# Altium PCB 5mm-6DUT-ECAL.PcbDoc (part 2 of 2)
Units mm, origin at the board's own origin, x right, y up, seen from the top; angles counter-clockwise.
Board outline 62 x 119 mm, 4 copper layers (Top Layer, Mid-Layer 1, Mid-Layer 2, Bottom Layer), stack 1.105 mm thick; 68 components, 63 nets, 769 pads, 1024 vias.
Unrouted connection lines stored in the file: 1.
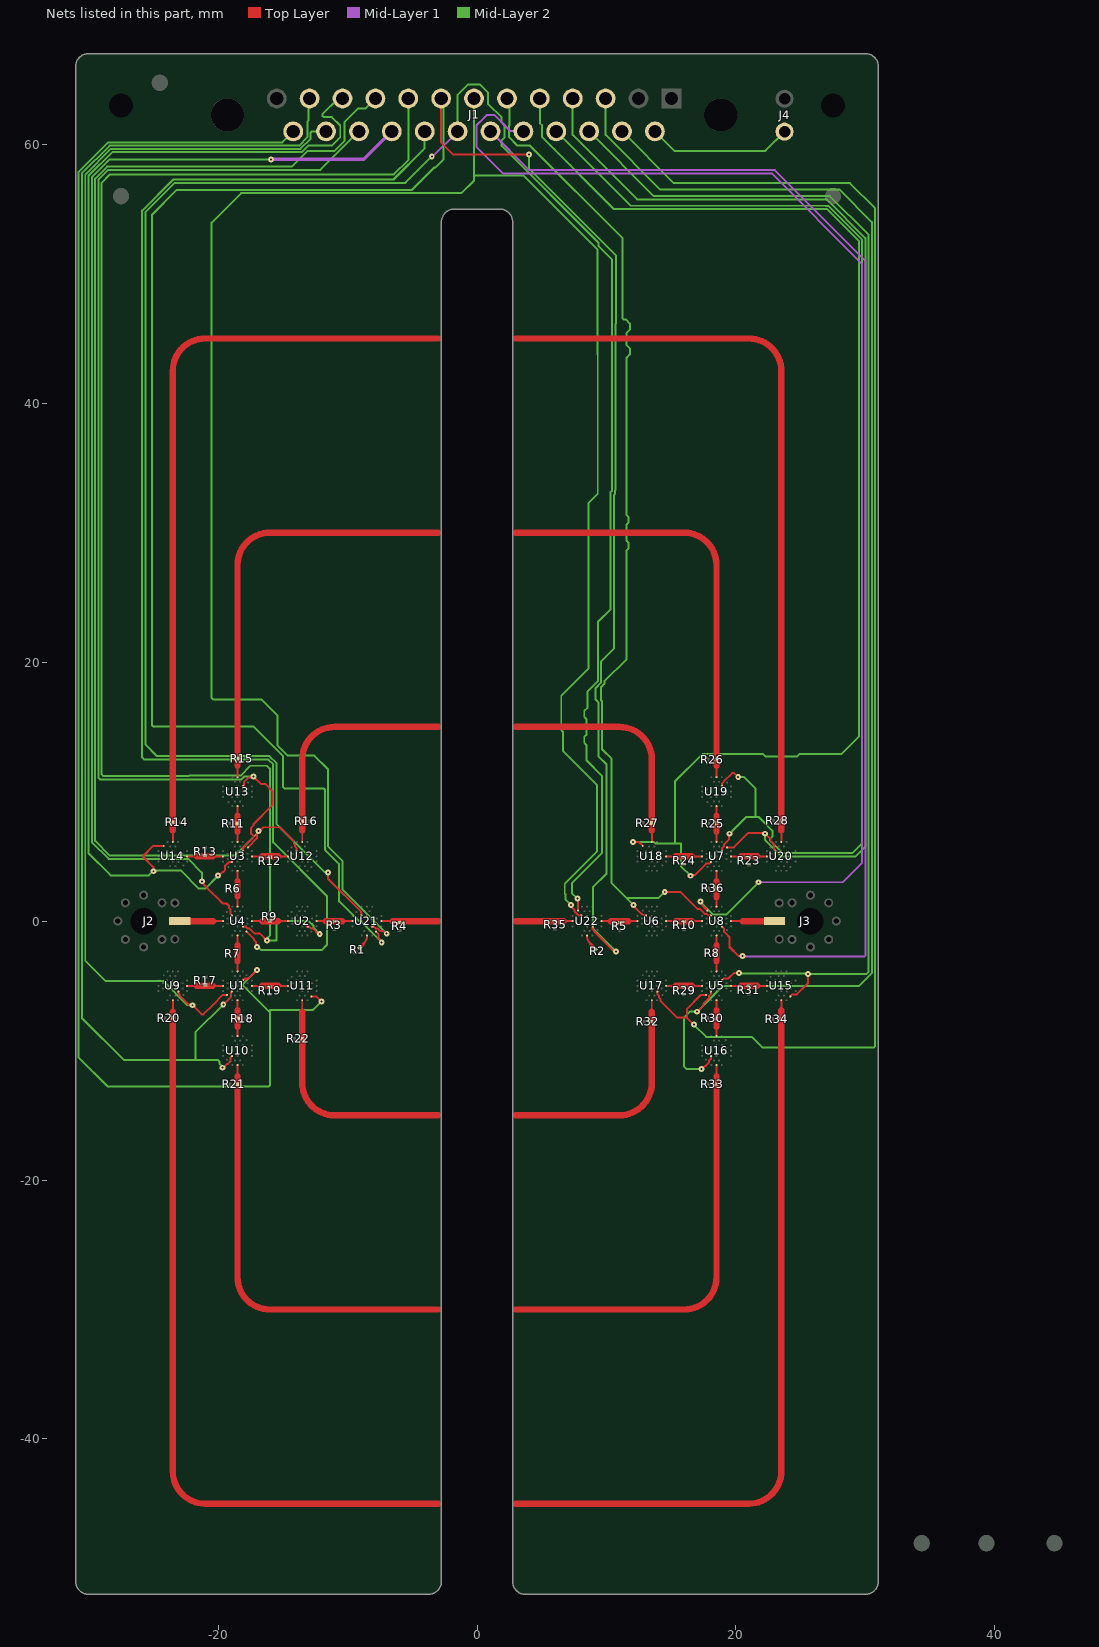
[diagram p4: the nets of this part, all layers, seen from the top]

## Via types
v1: diameter 0.457, hole 0.152, Top Layer to Bottom Layer, 964 vias
v2: diameter 2, hole 1.8, Top Layer to Bottom Layer, 60 vias

## Nets (pads, with @x,y where several pads share a name; then routed paths per layer and width w, separated by ;. In a path a pad name is that pad's centre, name@x,y a point inside that pad or via, vN(x,y) a via of type N, cw(c..) or ccw(c..) an arc to the next point about the centre after c; other vN are vias at no path point) (continued)
NetJ1_3: J1.3 U5.16 U16.16 | length 108.7
  Top Layer w0.152: v1(17,-7) 17.497,-6.503 17.497,-6.355 17.935,-5.917 17.935,-5.77 18.065,-5.64 U5.16@18.065,-5.435 ; v1(17.327,-11.416) 17.409,-11.416 17.687,-11.138 17.714,-11.138 17.934,-10.918 17.934,-10.771 18.065,-10.64 U16.16@18.065,-10.435
  Mid-Layer 2 w0.152: J1.3@9.93,63.54 9.93,60.721 14.151,56.5 28,56.5 30.502,53.998 30.502,-4.015 29.518,-5 19,-5 v1(17,-7) 16.439,-7 16,-7.439 16,-11.25 16.166,-11.416 v1(17.327,-11.416)
NetJ1_4: J1.4 U7.2 U20.21 | length 89.9
  Top Layer w0.152: U7.2@19.317,5.699 19.844,5.699 20.955,6.809 22.109,6.809 22.168,6.75 v1(22.25,6.75) 22.687,6.313 22.687,6.165 22.935,5.917 22.935,5.565 U20.21@23.065,5.435
  Mid-Layer 2 w0.152: J1.4@7.39,63.54 7.39,60.721 12.364,55.748 27,55.748 29.998,52.75 29.998,5.748 29.25,5 23.5,5 22.25,6.25 v1(22.25,6.75)
NetJ1_5: J1.5 U7.21 U18.2 | length 99.2
  Top Layer w0.152: v1(12.051,6.119) 12.06,6.11 12.509,6.11 U18.2@12.801,5.817 ; v1(16.5,3.5) 16.558,3.558 16.82,3.558 17.697,4.435 17.935,4.435 U7.21@18.065,4.565
  Mid-Layer 2 w0.152: J1.5@4.85,63.54 4.85,61.636 5.025,61.461 5.025,60.546 10.569,55.002 26.855,55.002 26.859,54.998 27.036,54.998 29.493,52.541 29.493,14.243 28.15,12.9 24.9,12.9 24.731,12.731 22.269,12.731 22.1,12.9 17.4,12.9 15.291,10.791 15.291,6 ; v1(12.051,6.119) 13.653,6.119 13.772,6 15.291,6 ; v1(16.5,3.5) 15.75,4.25 15.75,6 15.291,6
NetJ1_6: J1.6 U6.16 U8.16 | length 78.1
  Top Layer w0.152: v1(12.075,1.25) 12.075,1.189 12.697,0.566 12.729,0.566 12.86,0.435 U6.16@13.065,0.435 ; v1(14.5,2.25) 15.71,2.25 17.019,0.941 17.207,0.941 17.583,0.565 17.73,0.565 17.86,0.435 U8.16@18.065,0.435
  Mid-Layer 2 w0.152: J1.6@2.31,63.54 2.514,63.336 2.514,61.483 2.485,61.454 2.485,60.546 3.126,59.905 4.092,59.905 11.25,52.747 11.25,46.54 11.311,46.48 11.484,46.48 11.811,46.152 11.811,45.689 11.559,45.437 11.559,44.484 11.811,44.231 11.811,43.769 11.559,43.516 11.559,31.365 11.693,31.231 11.693,30.769 11.559,30.635 11.559,29.365 11.693,29.231 11.693,28.769 11.559,28.635 11.559,20.234 9.843,18.518 9.843,18.329 9.575,18.061 9.575,17.057 9.652,16.98 9.652,13.273 10.4,12.525 10.4,2.925 11.538,1.787 ; v1(12.075,1.25) 11.538,1.787 ; v1(14.5,2.25) 14.037,1.787 11.538,1.787
NetJ1_7: J1.7 U21.16 U22.16 | length 160.6
  Top Layer w0.152: -8.165,-0.435 U21.16@-8.065,-0.435 -7.96,-0.435 -7.83,-0.565 -7.683,-0.565 -7.501,-0.747 -7.286,-0.747 -7.057,-0.975 v1(-6.975,-0.975) ; v1(7.243,1.25) 7.243,1.168 7.516,0.894 7.516,0.745 7.697,0.565 7.73,0.565 7.86,0.435 U22.16@8.065,0.435
  Mid-Layer 2 w0.152: -20.5,53.958 -20.5,17.214 -20.411,17.125 -16.65,17.125 -15.425,15.9 -15.425,13.575 -14.627,12.777 -12.567,12.777 -11.5,11.711 -11.5,5.75 -10.375,4.625 -10.375,2.425 v1(-6.975,-0.975) ; -20.492,53.958 -18.225,56.225 -1.21,56.225 -0.23,57.205 -0.23,57.575 ; J1.7@-0.23,63.54 -0.23,57.575 ; v1(7.243,1.25) 7.243,1.257 6.848,1.652 6.848,2.057 6.775,2.13 6.775,2.894 9.25,5.369 9.25,10.525 6.624,13.151 6.624,14.633 6.506,14.75 6.506,17.406 8.625,19.525 8.625,32.3 9.325,33 9.325,43.767 9.324,43.769 9.324,51.851 3.6,57.575 -0.23,57.575
NetJ1_8: J1.8 U21.2 U22.21 | length 179.9
  Top Layer w0.152: U21.2@-7.801,-0.817 -7.788,-0.817 -7.605,-1 -7.605,-1.313 -7.362,-1.555 v1(-7.362,-1.638) ; J1.8@-2.77,63.54 -2.77,61.541 -2.787,61.524 -2.787,60.162 -1.825,59.2 v1(4,59.2) ; U22.21@8.935,-0.435 8.935,-0.64 9.065,-0.77 9.065,-0.803 10.612,-2.35 v1(10.75,-2.35)
  Mid-Layer 2 w0.152: v1(-7.362,-1.638) -8.973,-0.027 -9.098,-0.027 -10.65,1.525 -10.65,4.4 -11.752,5.502 -11.752,10.161 -11.842,10.25 -14.886,10.25 -14.975,10.339 -14.975,12.74 -17.269,15.034 -22.267,15.034 -22.269,15.032 -25.008,15.032 -25.097,15.121 -25.097,54.578 -23.198,56.477 -5.023,56.477 -3.286,58.214 -3.204,58.214 -2.598,58.82 -2.598,63.368 J1.8@-2.77,63.54 ; v1(4,59.2) 4,58.143 10.752,51.391 10.752,46.17 10.694,46.112 10.694,33.287 10.675,33.268 10.675,33 10.575,32.9 10.575,21.05 9.591,20.066 9.591,18.434 9.15,17.993 9.15,17.125 9.4,16.875 9.4,12.7 10,12.1 10,3.65 8.95,2.6 8.95,-0.55 v1(10.75,-2.35)
NetJ1_9: J1.9 U2.16 U4.16 | length 111.3
  Top Layer w0.152: U4.16@-18.065,-0.435 -17.86,-0.435 -17.729,-0.566 -17.582,-0.566 -17.185,-0.964 -16.761,-0.964 v1(-16.225,-1.5) ; -13.165,-0.435 U2.16@-13.065,-0.435 -12.96,-0.435 -12.829,-0.566 -12.682,-0.566 -12.248,-1 v1(-12.148,-1)
  Mid-Layer 2 w0.152: v1(-16.225,-1.5) v1@-16.167,-1.5 ; v1(-12.148,-1) -12.62,-0.528 -12.62,-0.38 -13,0 -15.5,0 -15.5,-1.5 -16.091,-1.5 -16.167,-1.425 -16.167,-1.286 -16,-1.12 -16,11.772 -16.228,12 -17.5,12 -18.263,11.237 -22.223,11.237 -22.269,11.191 -28.865,11.191 -29,11.326 -29,57.025 -28.35,57.675 -6.415,57.675 -5.31,58.78 J1.9@-5.31,63.54
NetJ1_10: J1.10 U3.2 U12.21 | length 95.9
  Top Layer w0.152: U3.2@-17.683,5.699 -16.998,6.384 -16.998,6.752 v1@-16.829,6.921 ; v1(-16.884,6.975) v1@-16.829,6.921 ; U12.21@-13.935,5.435 -13.935,5.64 -14.066,5.771 -14.066,5.918 -14.156,6.008 -14.156,6.156 -15.25,7.25 -16.5,7.25 -16.587,7.163 v1@-16.829,6.921
  Mid-Layer 2 w0.152: v1(-16.884,6.975) -16.964,6.895 -16.964,6.786 -18.698,5.052 -28.352,5.052 -29.505,6.205 -29.505,57.195 -29.505,57.352 -28.575,58.282 -14.298,58.282 -13.112,59.469 -11.031,59.469 -10.25,60.25 -10.25,61.7 -9.2,62.75 -8.64,62.75 J1.10@-7.85,63.54
NetJ1_11: J1.11 U3.21 U14.2 | length 94.8
  Top Layer w0.152: v1(-24.975,3.85) -24.996,3.871 -24.996,4.171 -25.763,4.938 -25.763,5.065 -25.011,5.817 U14.2@-24.199,5.817 ; v1(-20.008,3.534) -19.925,3.534 -19.676,3.783 -19.617,3.783 -19.451,3.949 -19.451,4.287 -19.303,4.435 -19.27,4.435 -19.14,4.565 U3.21@-18.935,4.565
  Mid-Layer 2 w0.152: v1(-20.008,3.534) -20.008,3.5 -20.992,2.516 -21.481,2.516 -22.859,3.894 -24.931,3.894 v1(-24.975,3.85) -25.024,3.85 -25.344,3.531 -28.303,3.531 -30.01,5.237 -30.01,57.561 -28.171,59.4 -13.537,59.4 -13.032,59.905 -11.206,59.905 -10.565,60.546 -10.565,61.454 -11.206,62.095 -11.85,62.095 -11.939,62.184 -11.939,62.311 -10.71,63.54 J1.11@-10.39,63.54
NetJ1_12: J1.12 U1.16 U10.16 | length 107.2
  Top Layer w0.152: v1(-19.675,-11.325) -19.593,-11.325 -19.319,-11.051 -19.257,-11.051 -19.046,-10.84 -19.046,-10.546 U10.16@-18.935,-10.435 ; v1(-19.6,-6.45) -19.015,-5.865 -19.015,-5.515 U1.16@-18.935,-5.435
  Mid-Layer 2 w0.152: v1(-19.675,-11.325) -19.675,-11.243 -19.892,-11.025 -19.892,-10.852 -20,-10.744 -21.75,-10.744 ; v1(-19.6,-6.45) -21.75,-8.6 -21.75,-10.744 ; J1.12@-12.93,63.54 -13,63.47 -13,61.843 -13.105,61.738 -13.105,60.546 -13.746,59.905 -28.38,59.905 -30.514,57.77 -30.514,-7.486 -27.256,-10.744 -21.75,-10.744
NetJ1_14: J1.14 J4.2 | length 11.2
  Mid-Layer 2 w0.152: J1.14@13.74,61 15.24,59.5 22.27,59.5 J4.2@23.75,60.98
NetJ1_15: J1.15 U5.2 U17.21 | length 108.3
  Top Layer w0.152: U17.21@13.935,-5.435 13.935,-5.64 14.066,-5.771 14.066,-5.918 14.156,-6.008 14.156,-6.156 15.454,-7.454 16.204,-7.454 ; v1(16.75,-8) 16.204,-7.454 ; U5.2@17.683,-5.699 17.301,-5.699 16.204,-6.796 16.204,-7.454
  Mid-Layer 2 w0.152: J1.15@11.2,61 15.2,57 28.8,57 30.755,55.045 30.755,-9.656 30.661,-9.75 22.037,-9.75 21.229,-8.941 17.691,-8.941 v1(16.75,-8)
NetJ1_16: J1.16 U5.21 U15.2 | length 96
  Top Layer w0.152: U5.21@18.935,-4.565 19.065,-4.435 19.417,-4.435 19.852,-4 v1(20.25,-4) ; U15.2@24.199,-5.817 24.353,-5.663 24.708,-5.663 25.55,-4.821 v1(25.55,-4.075)
  Mid-Layer 2 w0.152: J1.16@8.66,61 13.66,56 27.25,56 30.25,53 30.25,-3.911 30.086,-4.075 v1(25.55,-4.075) 25.512,-4.038 20.288,-4.038 v1(20.25,-4)
NetJ1_17: J1.17 U7.16 U19.16 | length 94
  Top Layer w0.152: U7.16@18.935,5.435 18.935,5.64 19.065,5.77 19.065,5.899 19.459,6.293 19.459,6.709 v1(19.5,6.75) ; U19.16@18.935,10.435 18.935,10.64 19.066,10.771 19.066,10.803 19.7,11.437 19.856,11.437 v1(20.174,11.119)
  Mid-Layer 2 w0.152: J1.17@6.12,61 11.865,55.255 26.959,55.255 26.964,55.25 27.141,55.25 29.745,52.645 29.745,5.998 29,5.252 23.605,5.252 22.637,6.22 22.637,6.346 22.809,6.519 22.809,6.981 21.75,8.04 21.5,8.04 ; v1(19.5,6.75) 20.79,8.04 21.5,8.04 ; v1@20.175,11.119 20.631,11.119 21.5,10.25 21.5,8.04
NetJ1_18: J1.18 U8.2 | length 101.4
  Top Layer w0.152: v1(17.25,1.5) 17.25,1.369 U8.2@17.801,0.817
  Mid-Layer 1 w0.152: J1.18@3.58,61 3.563,61.017 2.586,61.017 1.354,62.25 0.75,62.25 0.595,62.095 0.586,62.095 -0.055,61.454 -0.055,59.805 2,57.75 20.25,57.75 20.252,57.748 22.75,57.748 29.748,50.75 29.748,4.498 28.25,3 v1(21.75,3)
  Mid-Layer 2 w0.152: v1(17.25,1.5) 18.25,0.5 19.25,0.5 v1(21.75,3)
NetJ1_19: J1.19 U8.21 | length 99.4
  Top Layer w0.152: U8.21@18.935,-0.435 19.065,-0.565 19.065,-0.803 19.213,-0.951 19.215,-0.951 19.5,-1.236 19.5,-2 20.204,-2.704 20.487,-2.704 v1(20.5,-2.691)
  Mid-Layer 1 w0.152: J1.19@1.04,61 4.038,58.002 20.355,58.002 20.357,58 23,58 30,51 30,-2.661 29.911,-2.75 20.742,-2.75 ; v1(20.5,-2.691) 20.558,-2.75 20.741,-2.75
NetJ1_20: J1.20 U21.21 U22.2 | length 169.1
  Top Layer w0.152: v1(-11.5,3.75) -11.5,3.252 -8.953,0.705 -8.953,0.658 -8.935,0.64 U21.21@-8.935,0.435 ; v1(7.753,1.753) 7.801,1.704 U22.2@7.801,0.817
  Mid-Layer 1 w0.152: v1(-3.495,59.07) -3.417,59.07 -1.5,60.987 J1.20@-1.5,61
  Mid-Layer 2 w0.152: v1(-11.5,3.75) -11.546,3.796 -11.796,3.796 -15.48,7.48 -15.48,12.191 -16.039,12.75 -24.72,12.75 -25.602,13.632 -25.602,54.787 -23.359,57.03 -5.535,57.03 v1(-3.495,59.07) ; J1.20@-1.5,61 -1.5,63.823 -0.687,64.635 0.224,64.635 0.865,63.994 0.865,63.11 1.9,62.075 1.9,61.689 2.135,61.454 2.135,60.546 1.9,60.311 1.9,59.886 9.369,52.417 9.369,52.163 10.441,51.091 10.441,33.391 10.413,33.363 10.413,33.237 10.323,33.146 10.323,24.086 9.339,23.102 9.339,18.539 8.538,17.738 8.538,16.487 8.282,16.231 8.282,15.769 8.457,15.594 8.457,14.406 8.282,14.231 8.282,13.769 8.457,13.594 8.457,12.418 9.65,11.225 9.65,5.256 7.334,2.94 7.334,2.166 7.747,1.753 v1(7.753,1.753)
NetJ1_21: J1.21 U4.2 | length 100.6
  Top Layer w0.152: U4.2@-17.801,-0.817 -17.22,-1.399 -17.22,-1.467 -17.058,-1.628 -17.058,-1.942 v1(-17,-2)
  Mid-Layer 2 w0.152: v1(-17,-2) -16.918,-2 -16.668,-2.25 -12,-2.25 -11.589,-1.839 -11.589,1.921 -15.748,6.08 -15.748,12.102 -16.121,12.475 -25.7,12.475 -25.875,12.65 -25.875,54.871 -23.464,57.282 -6.451,57.282 -4.04,59.694 J1.21@-4.04,61
NetJ1_22: J1.22 U4.21 | length 89.9
  Top Layer w0.152: v1(-21.25,3.075) -21.25,2.993 -21.127,2.869 -21.127,2.856 -20.438,2.168 -20.438,2.16 -20.111,1.833 -20.103,1.833 -19.631,1.361 -19.35,1.361 -19.156,1.166 -19.156,1.008 -19.033,0.884 -19.033,0.533 U4.21@-18.935,0.435
  Mid-Layer 1 w0.254: v1(-15.925,58.841) -8.739,58.841 J1.22@-6.58,61
  Mid-Layer 2 w0.152: v1(-21.25,3.075) -21.25,3.75 -22.3,4.8 -28.458,4.8 -29.757,6.099 -29.757,57.457 -28.373,58.841 v1(-15.925,58.841)
NetJ1_23: J1.23 U3.16 U13.16 | length 88.9
  Top Layer w0.152: U3.16@-18.065,5.435 -18.065,5.64 -17.935,5.77 -17.935,5.803 -17.25,6.488 -17.25,6.551 -17.443,6.743 -17.443,7.206 -17.25,7.399 -17.25,7.5 -15.8,8.95 -15.8,10.05 -16.323,10.573 -16.684,10.573 v1(-17.265,11.155) -17.324,11.097 -17.64,11.097 -18.013,10.723 -18.013,10.487 U13.16@-18.065,10.435
  Mid-Layer 2 w0.152: v1(-17.265,11.155) -17.988,11.155 -18.204,10.939 -29.117,10.939 -29.252,11.074 -29.252,57.248 -28.475,58.025 -12.095,58.025 J1.23@-9.12,61
NetJ1_24: J1.24 U1.2 U9.21 | length 95.9
  Top Layer w0.152: U9.21@-23.065,-5.435 -23.065,-5.568 -22.985,-5.648 -22.985,-5.752 -22.935,-5.801 -22.935,-5.803 -22.787,-5.951 -22.785,-5.951 -22.277,-6.46 -22.015,-6.46 v1(-21.975,-6.5) -21.275,-7.2 -21.135,-7.2 -20.387,-6.452 -20.387,-6.447 -19.639,-5.699 U1.2@-19.317,-5.699
  Mid-Layer 2 w0.152: v1(-21.975,-6.5) -22.375,-6.5 -24.252,-4.623 -28.706,-4.623 -30.262,-3.067 -30.262,57.666 -28.275,59.652 -13.642,59.652 -12.852,60.442 -12.852,60.911 -12.763,61 J1.24@-11.66,61
NetJ1_25: J1.25 U1.21 U11.2 | length 119
  Top Layer w0.152: U1.21@-18.065,-4.565 -17.95,-4.45 -17.675,-4.45 -16.995,-3.77 v1(-16.98,-3.77) ; U11.2@-12.801,-5.817 -12.432,-5.818 v1(-12.025,-6.225)
  Mid-Layer 2 w0.152: v1(-16.98,-3.77) -18.063,-4.853 -18.063,-4.979 -16,-7.042 ; J1.25@-14.2,61 -15.043,60.157 -28.484,60.157 -30.767,57.875 -30.767,-10.546 -28.538,-12.775 -16.089,-12.775 -15.998,-12.683 -15.998,-7.095 -16,-7.093 -16,-6.85 -12.65,-6.85 v1(-12.025,-6.225)
NetJ2_1: J2.1 U4.11 | length 3.4
  Top Layer w0.152: -20.375,0 U4.11@-19.612,0
  Top Layer w0.495: J2.1@-22.975,0 -20.375,0
NetJ3_1: J3.1 U8.11 | length 3.4
  Top Layer w0.152: U8.11@19.615,-0.003 20.524,-0.003
  Top Layer w0.495: 20.524,-0.003 J3.1@22.972,-0.003
NetR1_1: R1.1 U21.14 | length 1.1
  Top Layer w0.152: -8.775,-1.775 ccw(c-9.438,-1.112) U21.14@-8.5,-1.112
  Top Layer w0.254: R1.1@-9.045,-2.045 -8.775,-1.775
NetR2_1: R2.1 U22.7 | length 1.1
  Top Layer w0.152: U22.7@8.5,-1.112 ccw(c9.438,-1.112) 8.775,-1.775
  Top Layer w0.254: 8.775,-1.775 R2.1@9.045,-2.045
NetR3_2: R3.2 U2.4 U21.11 | length 2.8
  Top Layer w0.152: U2.4@-12.388,0 -11.7,0 ; -10.4,0 U21.11@-9.612,0
  Top Layer w0.495: -11.7,0 -10.4,0
NetR4_2: R4.2 U21.4 | length 4.4
  Top Layer w0.152: U21.4@-7.388,0 -6.5,0
  Top Layer w0.495: -6.5,0 -3,0
NetR5_2: R5.2 U6.4 U22.11 | length 2.9
  Top Layer w0.152: U22.11@9.612,0 10.338,0 ; 11.696,0 U6.4@12.388,0
  Top Layer w0.495: 10.338,0 10.925,0 R5.2@11.025,-0.1 11.125,0 11.696,0
NetR6_2: R6.2 U3.11 U4.7 | length 2.8
  Top Layer w0.152: U4.7@-18.504,1.112 -18.504,1.9 ; -18.5,3.075 U3.11@-18.5,3.888
  Top Layer w0.495: -18.504,1.9 R6.2@-18.504,2.5 ; R6.2@-18.5,2.525 -18.5,3.075
NetR7_2: R7.2 U1.11 U4.14 | length 2.8
  Top Layer w0.152: U1.11@-18.5,-3.888 -18.5,-3.1 ; -18.5,-1.875 U4.14@-18.5,-1.112
  Top Layer w0.495: -18.5,-3.1 -18.5,-2.5 -18.5,-1.85
NetR8_2: R8.2 U5.11 U8.7 | length 2.8
  Top Layer w0.152: U5.11@18.496,-3.888 18.496,-3.1 ; 18.496,-1.875 U8.7@18.496,-1.112
  Top Layer w0.495: 18.496,-3.1 18.496,-1.85
NetR9_2: R9.2 U2.11 U4.4 | length 2.8
  Top Layer w0.152: U4.4@-17.392,0 -16.604,0 ; -15.379,0 -14.712,0 U2.11@-14.615,0
  Top Layer w0.495: -16.604,0 -16.087,0 -16.05,0 -16,0 -15.354,0
NetR10_2: R10.2 U6.11 U8.4 | length 2.8
  Top Layer w0.152: U6.11@14.612,0 15.375,0 ; 16.6,0 U8.4@17.388,0
  Top Layer w0.495: 15.35,0 16.6,0
NetR11_2: R11.2 U3.4 U13.11 | length 2.8
  Top Layer w0.152: U3.4@-18.5,6.112 -18.5,6.9 ; -18.5,8.125 U13.11@-18.5,8.888
  Top Layer w0.495: -18.5,6.9 -18.5,8.15
NetR12_2: R12.2 U3.14 U12.11 | length 2.8
  Top Layer w0.152: U3.14@-17.388,5 -16.6,5 ; -15.375,5 U12.11@-14.612,5
  Top Layer w0.495: -16.6,5 -16,5 -15.35,5
NetR13_2: R13.2 U3.7 U14.11 | length 2.8
  Top Layer w0.152: U14.11@-22.388,5 -21.625,5 ; -20.4,5 U3.7@-19.612,5
  Top Layer w0.495: -21.65,5 -20.4,5
NetR14_2: R14.2 U14.14 | length 58.3
  Top Layer w0.152: U14.14@-23.5,6.112 -23.5,7
  Top Layer w0.495: -23.5,7 -23.5,7.5 -23.5,42.5 cw(c-21,42.5) -21,45 ; -21.001,44.999 -3,44.999
NetR15_2: R15.2 U13.4 | length 33.3
  Top Layer w0.152: U13.4@-18.5,11.112 -18.5,12
  Top Layer w0.495: -18.5,12 -18.5,12.6 -18.5,27.5 cw(c-16,27.5) -16,30 -3,29.999
NetR16_2: R16.2 U12.7 | length 18.3
  Top Layer w0.152: U12.7@-13.5,6.112 -13.5,7
  Top Layer w0.495: -13.5,7 -13.5,9.1 -13.5,12.5 cw(c-11,12.5) -11,15 -3,15
NetR17_2: R17.2 U1.14 U9.11 | length 2.8
  Top Layer w0.152: U9.11@-22.388,-5 -21.625,-5 ; -20.4,-5 U1.14@-19.612,-5
  Top Layer w0.495: -21.65,-5 -20.4,-5
NetR18_2: R18.2 U1.4 U10.11 | length 2.8
  Top Layer w0.152: U10.11@-18.5,-8.888 -18.5,-8.125 ; -18.5,-6.9 U1.4@-18.5,-6.112
  Top Layer w0.495: -18.5,-8.15 -18.5,-6.9
NetR19_2: R19.2 U1.7 U11.11 | length 2.8
  Top Layer w0.152: U1.7@-17.388,-5 -16.6,-5 ; -15.375,-5 U11.11@-14.612,-5
  Top Layer w0.495: -16.6,-5 -15.35,-5
NetR20_2: R20.2 U9.7 | length 58.3
  Top Layer w0.152: -23.5,-7 U9.7@-23.5,-6.112
  Top Layer w0.495: -23.5,-7 R20.2@-23.5,-7.5 -23.5,-42.5 ccw(c-21.001,-42.5) -21.001,-44.999 -3,-44.999
NetR21_2: R21.2 U10.4 | length 33.3
  Top Layer w0.152: -18.5,-12 U10.4@-18.5,-11.112
  Top Layer w0.495: -18.5,-12 R21.2@-18.5,-12.6 -18.5,-27.5 ccw(c-16,-27.5) -16,-30 ; -16,-29.999 -3,-29.999
NetR22_2: R22.2 U11.14 | length 18.3
  Top Layer w0.152: -13.5,-7 U11.14@-13.5,-6.112
  Top Layer w0.495: -13.5,-7 R22.2@-13.5,-9.1 -13.5,-12.5 ccw(c-11,-12.5) -11,-15 -3,-15
NetR23_2: R23.2 U7.14 U20.11 | length 2.8
  Top Layer w0.152: U7.14@19.612,5 20.396,5 ; 21.646,5 U20.11@22.388,5
  Top Layer w0.495: 20.396,5 21.646,5
NetR24_2: R24.2 U7.7 U18.11 | length 2.8
  Top Layer w0.152: U18.11@14.612,5 15.346,5 ; 16.596,5 U7.7@17.385,5
  Top Layer w0.495: 15.346,5 16.596,5
NetR25_2: R25.2 U7.4 U19.11 | length 2.8
  Top Layer w0.152: U7.4@18.5,6.112 18.5,6.9 ; 18.5,8.125 U19.11@18.5,8.888
  Top Layer w0.495: 18.5,6.9 18.5,8.15
NetR26_2: R26.2 U19.4 | length 33.3
  Top Layer w0.152: U19.4@18.5,11.112 18.5,12
  Top Layer w0.495: 3,29.999 16,29.999 cw(c16,27.5) 18.5,27.5 18.5,12.6 18.5,12
NetR27_2: R27.2 U18.14 | length 18.3
  Top Layer w0.152: U18.14@13.5,6.112 13.5,7
  Top Layer w0.495: 3,15 11,15 cw(c11,12.5) 13.5,12.5 13.5,7
NetR28_2: R28.2 U20.7 | length 73.9
  Top Layer w0.152: U20.7@23.5,6.112 23.5,7
  Top Layer w0.495: 3,44.999 21.001,44.999 ; 5.476,44.999 21.011,44.999 ; 21,45 cw(c21,42.5) 23.5,42.5 23.5,7.5 23.5,7
NetR29_2: R29.2 U5.14 U17.11 | length 2.8
  Top Layer w0.152: U17.11@14.608,-5 15.371,-5 ; 16.596,-5 U5.14@17.385,-5
  Top Layer w0.495: 15.346,-5 16.596,-5
NetR30_2: R30.2 U5.4 U16.11 | length 2.8
  Top Layer w0.152: U16.11@18.496,-8.888 18.496,-8.125 ; 18.496,-6.9 U5.4@18.496,-6.112
  Top Layer w0.495: 18.496,-8.15 18.496,-6.9
NetR31_2: R31.2 U5.7 U15.11 | length 2.8
  Top Layer w0.152: U5.7@19.608,-5 20.396,-5 ; 21.621,-5 U15.11@22.385,-5
  Top Layer w0.495: 20.396,-5 21.646,-5
NetR32_2: R32.2 U17.7 | length 19.1
  Top Layer w0.152: 13.496,-7 U17.7@13.496,-6.112
  Top Layer w0.495: 3,-15 11,-15 ; 11.001,-14.999 ccw(c11.001,-12.5) 13.5,-12.5 13.5,-7.775 13.5,-7 ; R32.2@13.496,-7.775 13.496,-7
NetR33_2: R33.2 U16.4 | length 33.3
  Top Layer w0.152: 18.5,-11.996 U16.4@18.5,-11.112
  Top Layer w0.495: 3,-29.999 16,-29.999 ; 16,-30 ccw(c16,-27.5) 18.5,-27.5 18.5,-11.996
NetR34_2: R34.2 U15.14 | length 58.2
  Top Layer w0.152: 23.5,-6.9 U15.14@23.5,-6.112
  Top Layer w0.495: 3,-44.999 21.001,-44.999 ; 21,-45 ccw(c21,-42.5) 23.5,-42.5 R34.2@23.5,-7.575 ; R34.2@23.5,-7.427 23.5,-6.9
NetR35_2: R35.2 U22.4 | length 4.9
  Top Layer w0.152: 6.696,0 U22.4@7.388,0
  Top Layer w0.495: 3,0 6.5,0 ; R35.2@6,0 6.696,0
NetR36_2: R36.2 U7.11 U8.14 | length 2.8
  Top Layer w0.152: U8.14@18.496,1.112 18.496,1.875 ; 18.496,3.1 U7.11@18.496,3.888
  Top Layer w0.495: 18.496,1.85 18.496,2.525 18.496,3.1
pads on no net: f1.1 f2.1 f3.1 J1. J1.13 J2.gnd@-23.34,1.4 J2.gnd@-23.34,-1.4 J2.gnd@-24.336,1.414 J2.gnd@-24.336,-1.414 J2.gnd@-25.75,2 J2.gnd@-25.75,-2 J2.gnd@-27.164,1.414 J2.gnd@-27.164,-1.414 J3.gnd U1.29 U2.29 U3.29 U4.29 U5.29 U6.29 U7.29 U8.29 U9.29 U10.29 U11.29 U12.29 U13.29 U14.29 U15.29 U16.29 U17.29 U18.29 U19.29 U20.29 U21.29 U22.29

## Polygon pours and split planes (outlines as drawn)
no net on Top Solder "NONET_L-01_P-001" (solid): 31,-25 31,-5 25.5,-5 23.5,-7 21.625,-5.125 21.625,-5 20.4,-5 18.5,-6.9 16.6,-5 15.35,-5 15.35,-5.15 13.5,-7 11.5,-5 2.75,-5 2.75,-25
no net on Top Solder "NONET_L-01_P-001" (solid): 31.075,24.975 31.075,4.975 25.575,4.975 23.575,6.975 21.7,5.1 21.7,4.975 20.475,4.975 18.575,6.875 16.675,4.975 15.425,4.975 15.425,5.125 13.575,6.975 11.575,4.975 9.575,4.975 2.75,4.975 2.75,24.975
no net on Top Solder "NONET_L-01_P-001" (solid): 2.75,54 2.75,25 31,25 31,35 31,40 31,54
no net on Top Solder "NONET_L02_P-001" (solid): 2.75,5 31,5 31,-5 2.75,-5
no net on Top Solder "NONET_L-01_P-001" (solid): 2.75,-51.125 2.75,-25 31,-25 31,-35 31,-40 31,-51.125
no net on Top Solder "NONET_L-01_P-001" (solid): 3.5,-52 3.5,-51.125 30.1,-51.125 30.1,-52
no net on Top Solder "NONET_L-01_P-001" (solid): -30.1,-52 -30.1,-51.125 -3.5,-51.125 -3.5,-52
no net on Top Solder "NONET_L-01_P-001" (solid): -31,-51.125 -31,-25 -2.75,-25 -2.75,-51.125
no net on Top Solder "NONET_L02_P-001" (solid): -31,5 -2.75,5 -2.75,-5 -31,-5
no net on Top Solder "NONET_L-01_P-001" (solid): -31,54 -31,25 -2.75,25 -2.75,54
no net on Top Solder "NONET_L-01_P-001" (solid): -31,25 -31,5 -25.5,5 -23.5,7 -21.625,5.125 -21.625,5 -20.4,5 -18.5,6.9 -16.6,5 -15.35,5 -15.35,5.15 -13.5,7 -11.5,5 -9.5,5 -2.75,5 -2.75,25
no net on Top Solder "NONET_L-01_P-001" (solid): -31,-25 -31,-5 -25.5,-5 -23.5,-7 -21.625,-5.125 -21.625,-5 -20.4,-5 -18.5,-6.9 -16.6,-5 -15.35,-5 -15.35,-5.15 -13.5,-7 -11.5,-5 -2.75,-5 -2.75,-25
GND on Mid-Layer 2 "NONET_L-01_P-001" (solid, pour order 246): 30.75,54 30.75,-51.125 30.1,-51.125 30.1,-51.75 3.5,-51.75 3.5,-51.125 2.75,-51.125 2.75,54
GND on Mid-Layer 2 "NONET_L-01_P-001" (solid, remove dead copper, pour order 241): -2.75,54 -2.75,-51.125 -3.5,-51.125 -3.5,-51.75 -30.1,-51.75 -30.1,-51.125 -30.75,-51.125 -30.75,54
GND on Bottom Layer "NONET_L-01_P-001" (solid, pour order 245): 2.75,54 2.75,-51.125 3.5,-51.125 3.5,-51.75 30.1,-51.75 30.1,-51.125 30.75,-51.125 30.75,54
GND on Bottom Layer "NONET_L-01_P-001" (solid, pour order 243): -2.75,54 -2.75,-51.125 -3.5,-51.125 -3.5,-51.75 -30.1,-51.75 -30.1,-51.125 -30.75,-51.125 -30.75,54
no net on Bottom Solder "NONET_L-01_P-001" (solid): -2.75,54 -2.75,-51.125 -3.5,-51.125 -3.5,-52 -30.1,-52 -30.1,-51.125 -31,-51.125 -31,54
no net on Bottom Solder "NONET_L-01_P-001" (solid): 31,54 31,-51.125 30.1,-51.125 30.1,-52 3.5,-52 3.5,-51.125 2.75,-51.125 2.75,54
GND on Mid-Layer 1 "NONET_L-01_P-001" (solid, pour order 248): 30.75,54 30.75,-51.125 30.1,-51.125 30.1,-51.75 3.5,-51.75 3.5,-51.125 2.75,-51.125 2.75,54
GND on Mid-Layer 1 "NONET_L-01_P-001" (solid, pour order 247): -2.75,54 -2.75,-51.125 -3.5,-51.125 -3.5,-51.75 -30.1,-51.75 -30.1,-51.125 -30.75,-51.125 -30.75,54
GND on Mid-Layer 1 "NONET_L-01_P-001" (solid, pour order 251): -7.75,54 -7.75,56.75 7.75,56.75 7.75,54 5.75,54 5.75,55.25 -5.75,55.25 -5.75,54
GND on Top Layer "NONET_L-01_P-001" (solid, pour order 250): 30.75,54 30.75,-51.125 30.1,-51.125 30.1,-51.75 3.5,-51.75 3.5,-51.125 2.75,-51.125 2.75,54
GND on Top Layer "NONET_L-01_P-001" (solid, pour order 249): -2.75,54 -2.75,-51.125 -3.5,-51.125 -3.5,-51.75 -30.1,-51.75 -30.1,-51.125 -30.75,-51.125 -30.75,54

## Other copper
Top Layer:
  region net NetR35_2: 3.203,0.25 2.75,0.25 2.75,-0.248 3.203,-0.248
  region net NetR34_2: 3.203,-44.75 2.75,-44.75 2.75,-45.248 3.203,-45.248
  region net NetR33_2: 3.203,-29.75 2.75,-29.75 2.75,-30.248 3.203,-30.248
  region net NetR32_2: 3.203,-14.75 2.75,-14.75 2.75,-15.248 3.203,-15.248
  region net NetR28_2: 3.203,45.248 2.75,45.248 2.75,44.75 3.203,44.75
  region net NetR26_2: 3.203,30.248 2.75,30.248 2.75,29.75 3.203,29.75
  region net NetR27_2: 3.203,15.248 2.75,15.248 2.75,14.75 3.203,14.75
  rectangle net NetR14_2: -3.203,44.75 -2.75,45.248
  rectangle net NetR15_2: -3.203,29.75 -2.75,30.248
  rectangle net NetR16_2: -3.203,14.75 -2.75,15.248
  rectangle net NetR4_2: -3.203,-0.248 -2.75,0.25
  rectangle net NetR22_2: -3.203,-15.248 -2.75,-14.75
  rectangle net NetR21_2: -3.203,-30.248 -2.75,-29.75
  rectangle net NetR20_2: -3.203,-45.248 -2.75,-44.75
  region net NetR28_2: 5.703,45.25 5.25,45.25 5.25,44.752 5.703,44.752
  pour cut-out: -25.75,-1.664 ccw(c-25.75,0) -24.086,0 ccw(c-25.75,0) -25.75,1.664 ccw(c-25.75,0) -27.414,0 ccw(c-25.75,0)
  pour cut-out: 25.75,1.664 ccw(c25.75,0) 24.086,0 ccw(c25.75,0) 25.75,-1.664 ccw(c25.75,0) 27.414,0 ccw(c25.75,0)
  pour cut-out: -21.94,-0.711 -25.75,-0.711 -25.75,0.711 -21.94,0.711
  pour cut-out: -21.94,-0.711 -21.432,-0.203 -21.432,0.203 -21.94,0.711
  pour cut-out: 21.94,0.711 21.432,0.203 21.432,-0.203 21.94,-0.711
  pour cut-out: 21.94,0.711 25.75,0.711 25.75,-0.711 21.94,-0.711
Mid-Layer 1:
  pour cut-out: -27.414,-0.013 ccw(c-25.75,-0.013) -25.75,-1.676 ccw(c-25.75,-0.013) -24.086,-0.013 ccw(c-25.75,-0.013) -25.75,1.651 ccw(c-25.75,-0.013)
  pour cut-out: 27.414,0.013 ccw(c25.75,0.013) 25.75,1.676 ccw(c25.75,0.013) 24.086,0.013 ccw(c25.75,0.013) 25.75,-1.651 ccw(c25.75,0.013)
  pour cut-out: -22.042,-0.559 -25.75,-0.559 -25.75,0.559 -22.042,0.559
  pour cut-out: -22.042,-0.559 -22.042,0.559 -21.483,0
  pour cut-out: 22.042,0.559 22.042,-0.559 21.483,0
  pour cut-out: 22.042,0.559 25.75,0.559 25.75,-0.559 22.042,-0.559
Mid-Layer 2:
  pour cut-out: -27.414,-0.013 ccw(c-25.75,-0.013) -25.75,-1.676 ccw(c-25.75,-0.013) -24.086,-0.013 ccw(c-25.75,-0.013) -25.75,1.651 ccw(c-25.75,-0.013)
  pour cut-out: 27.414,0.013 ccw(c25.75,0.013) 25.75,1.676 ccw(c25.75,0.013) 24.086,0.013 ccw(c25.75,0.013) 25.75,-1.651 ccw(c25.75,0.013)
  pour cut-out: 27.414,0.013 ccw(c25.75,0.013) 25.75,1.676 ccw(c25.75,0.013) 24.086,0.013 ccw(c25.75,0.013) 25.75,-1.651 ccw(c25.75,0.013)
  pour cut-out: -22.042,-0.559 -25.75,-0.559 -25.75,0.559 -22.042,0.559
  pour cut-out: -22.042,-0.559 -22.042,0.559 -21.483,0
  pour cut-out: 22.042,0.559 25.75,0.559 25.75,-0.559 22.042,-0.559
  pour cut-out: 22.042,0.559 22.042,-0.559 21.483,0
Bottom Layer:
  pour cut-out: -27.414,-0.013 ccw(c-25.75,-0.013) -25.75,-1.676 ccw(c-25.75,-0.013) -24.086,-0.013 ccw(c-25.75,-0.013) -25.75,1.651 ccw(c-25.75,-0.013)
  pour cut-out: 27.414,0.013 ccw(c25.75,0.013) 25.75,1.676 ccw(c25.75,0.013) 24.086,0.013 ccw(c25.75,0.013) 25.75,-1.651 ccw(c25.75,0.013)

## Silkscreen, mask and mechanical layers (free items; w line width, h text height)
Top Overlay:
  text "FLUX" at 26.004,60.504 h0.76
  text "BIAS" at 26.004,59.254 h0.76
  text "5mm-6DUT-ECAL" at -23.746,55.004 h1.52
Top Solder:
  drawing of 58 lines, arcs and shapes, not listed
Mechanical 1:
  lines w0.254: -2.75,-51.087 -2.75,53.913 ; -2.75,-51 cw(c-3.75,-51) -3.75,-52 -30,-52 cw(c-30,-51) -31,-51 -31,66 cw(c-30,66) -30,67 30,67 cw(c30,66) 31,66 31,-51 cw(c30,-51) 30,-52 3.75,-52 cw(c3.75,-51) 2.75,-51 2.75,54 ccw(c1.75,54) 1.75,55 -1.75,55 ccw(c-1.75,54) -2.75,54
Bottom Assembly:
  lines w0.254: -22.5,58 -22.5,66.5 25.5,66.5 25.5,58 -22.5,58
Mechanical 15:
  lines w0.254: -2.5,-47.5 0,-47.5 2.5,-47.5 2.5,-42.5 -2.5,-42.5 -2.5,-47.5 ; -2.5,-32.5 0,-32.5 2.5,-32.5 2.5,-27.5 -2.5,-27.5 -2.5,-32.5 ; -2.5,-17.5 0,-17.5 2.5,-17.5 2.5,-12.5 -2.5,-12.5 -2.5,-17.5 ; -2.5,-2.5 0,-2.5 2.5,-2.5 2.5,2.5 -2.5,2.5 -2.5,-2.5 ; -2.5,12.5 0,12.5 2.5,12.5 2.5,17.5 -2.5,17.5 -2.5,12.5 ; -2.5,27.5 0,27.5 2.5,27.5 2.5,32.5 -2.5,32.5 -2.5,27.5 ; -2.5,42.5 -2.5,47.5 2.5,47.5 2.5,42.5 0,42.5 -2.5,42.5
  text "6" at -1.111,43.639 h3
  text "5" at -1.361,28.389 h3
  text "4" at -1.361,13.889 h3
  text "3" at -0.861,-16.111 h3
  text "2" at -0.861,-31.111 h3
  text "1" at -0.361,-46.111 h3